# EAGLE board mccthulhu-mini (EAGLE 7.1.0)
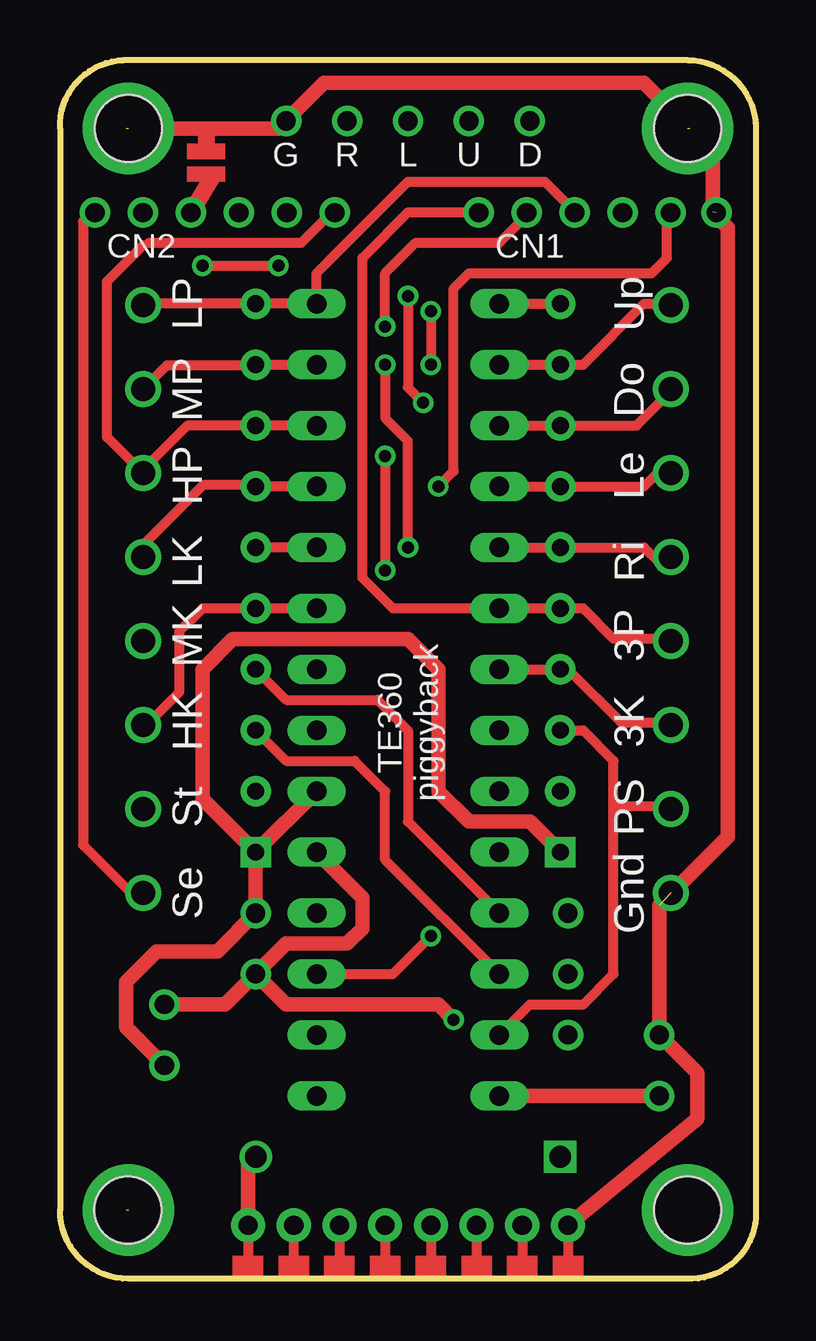
[diagram p0: board, top side]
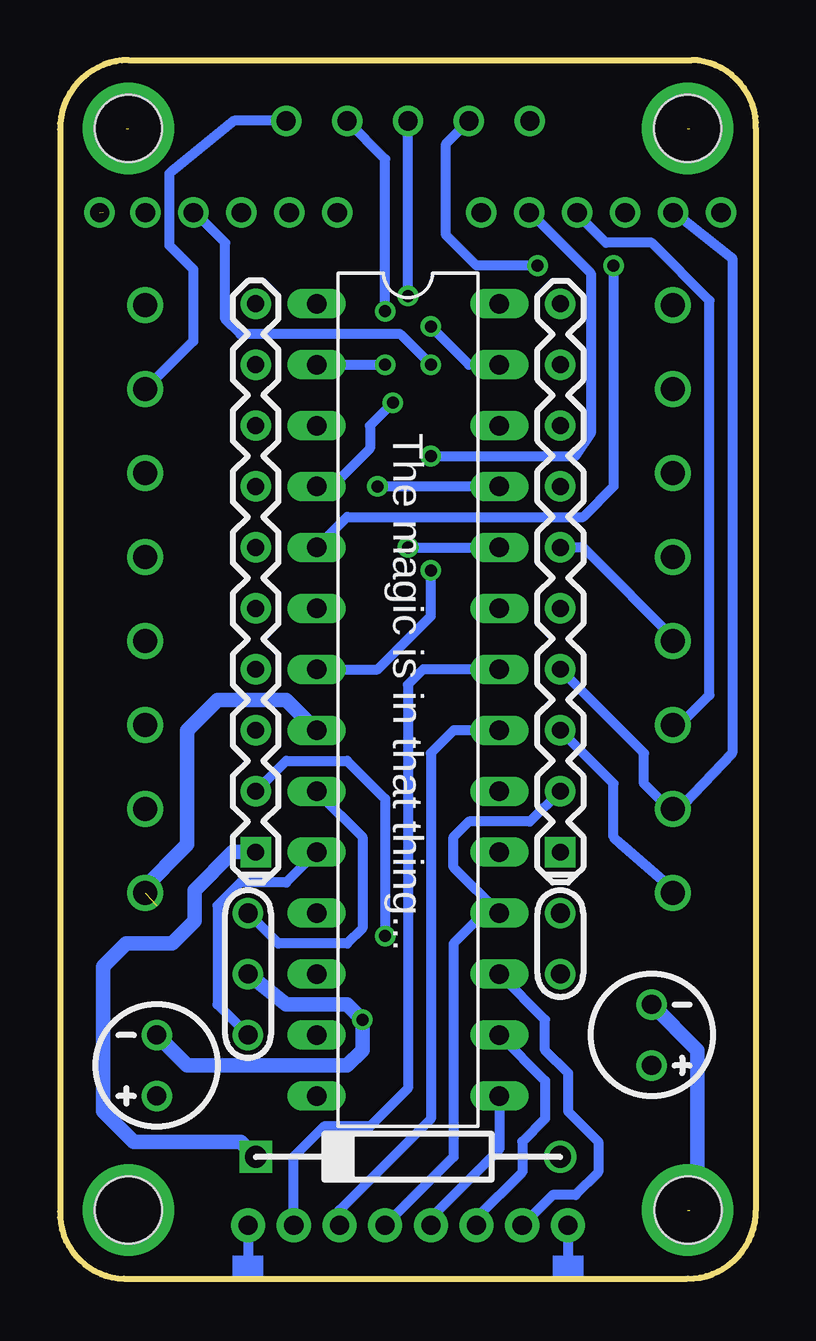
[diagram p1: board, bottom side, seen from below]

Size 29.02 x 50.8 mm. Coordinates in mm from the lower left corner, seen from the top.
Outline: 29.02,47.89 29.02,2.81 arc-90 26.35,0 2.86,0 arc-90 0,2.86 0,47.94 arc-90 2.67,50.8 26.16,50.8 arc-90 29.02,47.89
Copper layers (1*16): Top 0.0356mm / dielectric 1.5011mm / Bottom 0.0356mm
Design rules "LaenPCBOrder *": minimum track width 6mil, minimum drill 13mil, track to track 6mil, track to pad 6mil, pad to pad 6mil, via to via 6mil, smd to smd 6mil, copper to edge 15mil, drill to drill 6mil, minimum pad ring 7mil, minimum via ring 7mil, stop-mask expansion 10mil, vias tented up to drill 20mil, thermal gap 10mil
Holes 2.8 mm at 2.86,47.94 26.16,47.94 26.16,2.86 2.83,2.86

## Footprints (pad centres in the part's own frame; a part is rotated, then mirrored left to right if it is on the bottom)
DIL28 = drill 0.813 long: 1 -16.51,-3.81; 2 -13.97,-3.81; 3 -11.43,-3.81; 4 -8.89,-3.81; 5 -6.35,-3.81; 6 -3.81,-3.81; 7 -1.27,-3.81; 8 1.27,-3.81; 9 3.81,-3.81; 10 6.35,-3.81; 11 8.89,-3.81; 12 11.43,-3.81; 13 13.97,-3.81; 14 16.51,-3.81; 15 16.51,3.81; 16 13.97,3.81; 17 11.43,3.81; 18 8.89,3.81; 19 6.35,3.81; 20 3.81,3.81; 21 1.27,3.81; 22 -1.27,3.81; 23 -3.81,3.81; 24 -6.35,3.81; 25 -8.89,3.81; 26 -11.43,3.81; 27 -13.97,3.81; 28 -16.51,3.81

## Placement (x,y rotation side)
'  [DIL28]  14.51,24.13 270 bottom

## Library data of the parts
' = pic18f2550

## Nets
GND: '.19
S$6: '.17
S$8: '.16
S$16: '.7
S$17: '.27
S$23: '.25
S$25: '.9
S$26: '.13
S$28: '.6
S$30: '.14
S$37: '.15
S$39: '.8
S$46: '.10
S$54: '.24
S$55: '.5
S$59: '.4
S$62: '.2
VCC: '.20

## Tracks (layer width: path | path; a pad name or v marks a point on that pad's centre or on a via)
GND  (via drill 0.5 pad 0.25, 0.8 pad 1.27, 0.8 pad 1.42, 1 pad 1.42, 1 pad 3.81)  (5 unrouted)
  Top 0.406: 6.25,46.99 6.25,47.94 5.94,47.94 5.94,46.99 | v21.18,2.22 21.18,0.64 | 26.26,47.94 26.26,47.62 27.21,46.67
  Top 0.61: v21.18,2.22 26.57,6.67 26.57,8.57 v24.99,10.16 24.99,15.56 27.84,18.42 27.84,43.81 27.21,44.45 27.21,46.67 | v4.35,11.43 6.89,11.43 v8.16,12.7 | v8.16,12.7 9.43,11.43 15.78,11.43 v16.41,10.8 | v8.16,12.7 9.43,13.97 11.97,13.97 12.61,14.61 12.61,15.88 '.19 | 26.26,47.94 24.35,49.85 11.02,49.85 v9.43,48.26 9.11,47.94 6.25,47.94 2.76,47.94
  Bottom 0.406: v21.18,2.22 21.18,0.32
  Bottom 0.61: v24.99,10.16 23.72,8.89 17.05,8.89 16.41,9.53 v16.41,10.8 17.05,11.43 19.59,11.43 v21.18,12.7 | v4.35,11.43 2.45,9.53 2.45,3.18 2.76,2.86
  other vias: 27.37,44.44 26.16,47.94 2.86,47.94 25.46,16.08 2.86,2.86
S$1  (via drill 0.8 pad 1.42, 0.9 pad 1.27)
  Top 0.61: v7.84,2.22 7.84,4.76 v8.16,5.08
  Bottom 0.406: v7.84,2.22 7.84,0.32
S$3
  Top 0.406: 3.4,40.64 10.7,40.64 10.7,41.91 14.51,45.72 20.23,45.72 21.5,44.45
S$4
  Top 0.406: 1.46,44.58 0.96,44.08 0.96,18.08 2.96,16.08
S$5  (via drill 0.8 pad 1.27)
  other vias: 25.46,44.44
S$6  (via drill 0.5 pad 0.25, 0.7 pad 1.27, 0.8 pad 1.42)
  Top 0.406: '.17 13.88,12.7 v15.46,14.29 | v9.75,2.22 9.75,0.64
  Bottom 0.406: '.17 8.8,10.8 8.8,9.53 7.84,8.57 7.84,6.98 6.57,5.72 6.57,4.45 7.52,3.49 8.48,3.49 v9.75,2.22 | v20.86,20.32 19.59,21.59 17.05,21.59 15.46,20 v15.46,14.29
S$7  (via drill 1 pad 1.42)
  Top 0.406: v3.46,37.08 4.46,38.08 7.96,38.08
S$8  (via drill 0.8 pad 1.42)
  Bottom 0.406: '.16 8.8,8.26 8.8,6.67 9.75,5.72 9.75,4.45 11.65,2.54 v11.65,2.22
S$10  (via drill 0.7 pad 1.27)
  Top 0.406: 10.7,35.56 v8.16,35.56 5.3,35.56 3.72,33.97 3.4,33.97
S$11  (via drill 0.7 pad 1.27)
  other vias: 8.16,40.64
S$12  (via drill 1 pad 3.81)
  other vias: 26.16,2.86
S$13  (via drill 0.7 pad 1.27, 0.8 pad 1.42)
  Top 0.406: v15.46,2.22 15.46,0.64
  Bottom 0.406: v8.16,20.32 9.43,19.05 11.97,19.05 12.61,18.42 12.61,17.15 10.7,15.24 11.34,15.24 12.61,13.97 12.61,5.08 v15.46,2.22
S$14  (via drill 0.7 pad 1.27)
  Top 0.406: 10.7,30.48 v8.16,30.48
  Bottom 0.406: 3.17,26.44 7.21,30.48 v8.16,30.48
S$16  (via drill 0.5 pad 0.25)
  Top 0.406: v13.56,34.29 v13.56,29.53
  Bottom 0.406: v13.56,34.29 7.52,34.29 6.89,35.24 6.89,41.91 9.43,44.45 | '.7 15.78,25.4 13.56,27.62 v13.56,29.53
S$17  (via drill 0.5 pad 0.25, 0.7 pad 1.27)
  Top 0.406: v8.16,38.1 '.27 | v13.56,39.69 13.56,41.91 14.83,43.18 18.32,43.18 19.59,44.45
  Bottom 0.406: '.27 11.97,38.1 v13.56,39.69
S$18  (via drill 0.7 pad 1.27)
  Top 0.406: 18.32,40.64 v20.86,40.64
S$19  (via drill 0.7 pad 1.27)
  Top 0.406: 18.32,38.1 v20.86,38.1 21.81,38.1 24.35,40.64 25.62,40.64
S$20  (via drill 0.7 pad 1.27)
  Top 0.406: 18.32,35.56 v20.86,35.56 24.04,35.56 25.3,36.83
S$21  (via drill 0.7 pad 1.27)
  Top 0.406: 18.32,33.02 v20.86,33.02 24.35,33.02 24.99,33.66
S$22  (via drill 0.7 pad 1.27)
  Top 0.406: 18.32,30.48 v20.86,30.48 24.35,30.48 24.99,29.84
S$23  (via drill 0.5 pad 0.25)
  Top 0.406: 25.3,44.45 25.3,42.55 24.67,41.91 17.05,41.91 16.41,41.28 16.41,33.66 v15.78,33.02
  Bottom 0.406: '.25 v15.78,33.02
S$24
  Top 0.406: 7.84,2.22 7.84,0.64
S$25  (via drill 0.8 pad 1.27)
  Bottom 0.406: '.9 16.41,18.42 16.41,14.61 17.05,13.97 19.91,13.97 v21.18,15.24
S$26  (via drill 0.7 pad 1.27)
  Top 0.406: '.13 19.59,11.43 21.81,11.43 23.08,12.7 23.08,19.69 | v20.86,22.86 21.81,22.86 23.08,21.59 23.08,19.69 | 25.3,19.69 23.08,19.69
S$27  (via drill 0.7 pad 1.27)
  Top 0.406: 18.32,12.7 13.56,17.46 13.56,20.32 12.29,21.59 9.43,21.59 v8.16,22.86
  Bottom 0.406: v8.16,22.86 5.94,20.64 5.94,18.42 5.62,18.1 3.4,16.19
S$28  (via drill 0.7 pad 1.27)
  Top 0.406: 17.05,44.45 14.51,44.45 12.61,42.55 12.61,29.21 13.88,27.94 '.6 v20.86,27.94 21.81,27.94 23.08,26.67 25.3,26.67
S$29
  Top 0.406: 3.72,43.18 10.07,43.18 11.34,44.45
S$30  (via drill 0.8 pad 1.27)
  Top 0.61: '.14 v24.99,7.62
S$31  (via drill 1 pad 1.42)
  Bottom 0.406: 24.46,46.08 24.46,43.08 23.46,42.08 23.46,39.08 v25.46,37.08
S$32  (via drill 0.7 pad 1.27)
  Top 0.406: 18.32,25.4 v20.86,25.4 21.18,25.4 23.4,23.18 25.62,23.18
S$33  (via drill 1 pad 1.42)
  Top 0.406: v3.46,33.58 1.96,35.08 1.96,41.58 3.46,43.08
S$34  (via drill 1 pad 1.42)
  Top 0.406: 7.96,33.08 5.96,33.08 3.46,30.58 v3.46,30.08
S$35  (via drill 0.7 pad 1.27)
  Top 0.406: 10.7,33.02 v8.16,33.02
S$37  (via drill 0.8 pad 1.42)
  Top 0.406: v13.56,2.22 13.56,0.64
  Bottom 0.406: v13.56,2.22 13.56,2.54 10.7,5.4 '.15 10.7,7.3
S$39
  Bottom 0.61: 25.62,16.19 23.72,18.1 23.72,22.86 22.45,24.13 19.59,24.13 '.8
S$40  (via drill 0.8 pad 1.42)
  Top 0.406: v19.27,2.22 19.27,0.64
  Bottom 0.406: 10.7,25.4 13.88,25.4 14.51,24.77 14.51,7.94 16.1,6.35 18,6.35 19.27,5.08 v19.27,2.22
S$43  (via drill 0.8 pad 1.42)
  Top 0.406: v17.37,2.22 17.37,0.64
  Bottom 0.406: 10.7,22.86 12.61,22.86 13.56,21.91 13.56,6.67 17.37,2.86 v17.37,2.22
S$44
  Top 0.406: 11.65,1.91 11.65,0.64
S$46  (via drill 0.8 pad 1.27)
  Bottom 0.406: '.10 19.59,16.51 21.5,16.51 22.45,15.56 22.45,11.43 v21.18,10.16
S$49  (via drill 0.7 pad 1.27)
  Top 0.406: 10.7,27.94 v8.16,27.94 5.94,27.94 4.99,26.99 4.99,24.46 3.9,23.38
S$50  (via drill 0.7 pad 1.27)
  Top 0.406: v8.16,25.4 9.43,24.13 13.24,24.13 14.51,22.86 14.51,19.05 18.32,15.24
  Bottom 0.406: v8.16,25.4 4.67,21.91 4.67,20.64 3.72,19.69
S$51
  Bottom 0.406: 3.4,19.37 0.99,21.91 0.99,42.55 3.4,44.45
S$54  (via drill 0.5 pad 0.25)
  Top 0.406: v13.56,38.1 13.56,35.88 14.51,34.92 v14.51,30.48
  Bottom 0.406: 23.4,44.45 22.13,43.18 22.13,40.01 21.5,39.37 14.83,39.37 v13.56,38.1 | v14.51,30.48 '.24
S$55  (via drill 0.5 pad 0.25, 0.8 pad 1.27)
  Top 0.406: v5.94,42.23 v9.11,42.23
  Bottom 0.406: '.5 17.05,31.75 7.21,31.75 5.94,33.02 v5.94,42.23 | v9.11,42.23 11.65,42.23 12.92,43.5 12.92,47.31 v11.97,48.26
S$56
  Top 0.406: 6.57,46.04 5.62,44.45
S$59  (via drill 0.5 pad 0.25, 0.8 pad 1.27)
  Top 0.406: v15.14,36.51 14.51,37.15 v14.51,40.96
  Bottom 0.406: v14.51,40.96 v14.51,48.26 | v15.14,36.51 16.1,35.56 16.1,34.61 17.69,33.02 '.4
S$61
  Bottom 0.406: 7.52,44.45 6.25,43.18 4.35,43.18 1.95,40.78 1.95,24.33 3.4,22.88
S$62  (via drill 0.5 pad 0.25, 0.8 pad 1.27)
  Top 0.406: v15.46,40.32 v15.46,38.1
  Bottom 0.406: '.2 v15.46,38.1 | v17.05,48.26 15.46,46.67 v15.46,40.32
S$63  (via drill 0.8 pad 1.27)
  Bottom 0.406: v19.59,48.26 21.77,48.26 24.35,46.17
S$66  (via drill 0.8 pad 1.27)
  other vias: 1.46,44.44
S$67  (via drill 0.8 pad 1.27)
  other vias: 3.46,44.44
S$68  (via drill 0.8 pad 1.27)
  other vias: 5.46,44.44
S$69  (via drill 0.8 pad 1.27)
  other vias: 7.46,44.44
S$70  (via drill 0.8 pad 1.27)
  other vias: 9.46,44.44
S$71  (via drill 0.8 pad 1.27)
  other vias: 11.46,44.44
S$72  (via drill 0.8 pad 1.27)
  other vias: 17.46,44.44
S$73  (via drill 0.8 pad 1.27)
  other vias: 19.46,44.44
S$74  (via drill 0.8 pad 1.27)
  other vias: 21.46,44.44
S$75  (via drill 0.8 pad 1.27)
  other vias: 23.46,44.44
S$79
  Top 0.406: 6.25,46.04 5.3,44.45
S$85  (via drill 1 pad 1.42)
  other vias: 3.46,40.58
S$86  (via drill 1 pad 1.42)
  other vias: 3.46,16.08
S$87  (via drill 1 pad 1.42)
  other vias: 3.46,19.58
S$90  (via drill 1 pad 1.42)
  other vias: 3.46,23.08
S$91  (via drill 1 pad 1.42)
  other vias: 3.46,26.58
S$92  (via drill 1 pad 1.42)
  other vias: 25.46,30.08
S$93  (via drill 1 pad 1.42)
  other vias: 25.46,33.58
S$95  (via drill 1 pad 1.42)
  other vias: 25.46,40.58
S$97  (via drill 1 pad 1.42)
  other vias: 25.46,19.58
S$98  (via drill 1 pad 1.42)
  other vias: 25.46,23.08
S$99  (via drill 1 pad 1.42)
  other vias: 25.46,26.58
VCC  (via drill 0.7 pad 1.27, 0.8 pad 1.27, 0.9 pad 1.27)
  Top 0.61: v8.16,17.78 v8.16,15.24 6.57,13.65 4.03,13.65 2.76,12.38 2.76,10.48 v4.35,8.89 | v8.16,17.78 '.20 | v8.16,17.78 5.94,20 5.94,25.4 7.21,26.67 14.51,26.67 15.78,25.4 15.78,20.32 17.05,19.05 19.59,19.05 v20.86,17.78
  Bottom 0.61: v20.86,5.08 21.5,5.72 25.94,5.72 27.21,6.98 27.21,13.02 26.26,13.97 24.35,13.97 23.4,14.92 23.4,16.19 21.81,17.78 v20.86,17.78
(copper drawn outside any net)
  shapes: Bottom area x2, Top area x10

## Text on the board
tNames: G | R | L | U | D | CN2 | CN1 | LP | Up | MP | Do | HP | Le | LK | Ri | MK | 3P | HK | TE360 / piggyback | 3K | St | PS | Se | Gnd
bNames: The magic is in that thing...